# Altium PCB PCB_CBLX.PcbDoc
Units mm, origin at the board's own origin, x right, y up, seen from the top; angles counter-clockwise.
Board outline 114.68 x 132.84 mm, 2 copper layers (Top Layer, Bottom Layer); 15 components, 23 nets, 80 pads, 0 vias.
Unrouted connection lines stored in the file: 38.
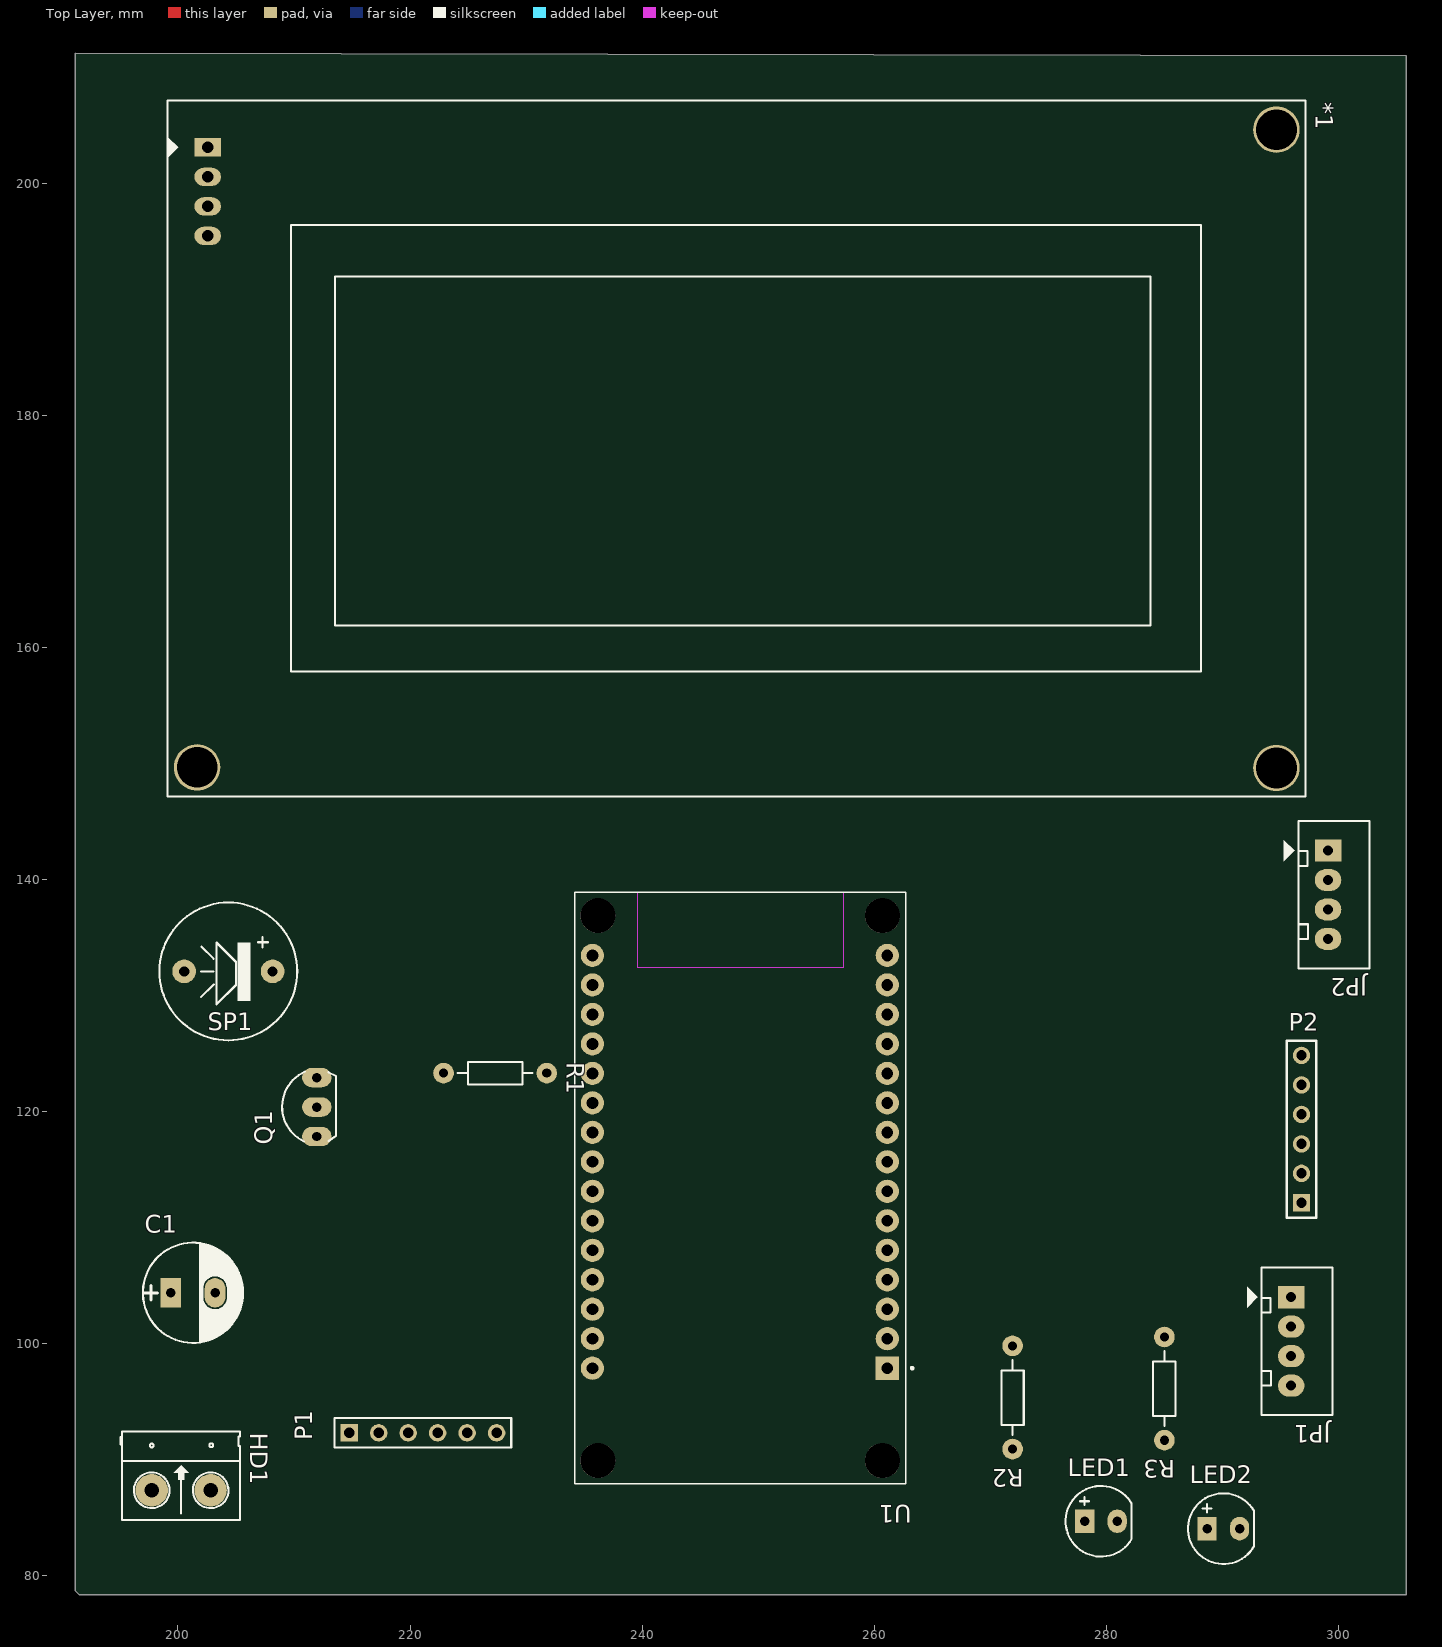
[diagram p0: Top Layer view]
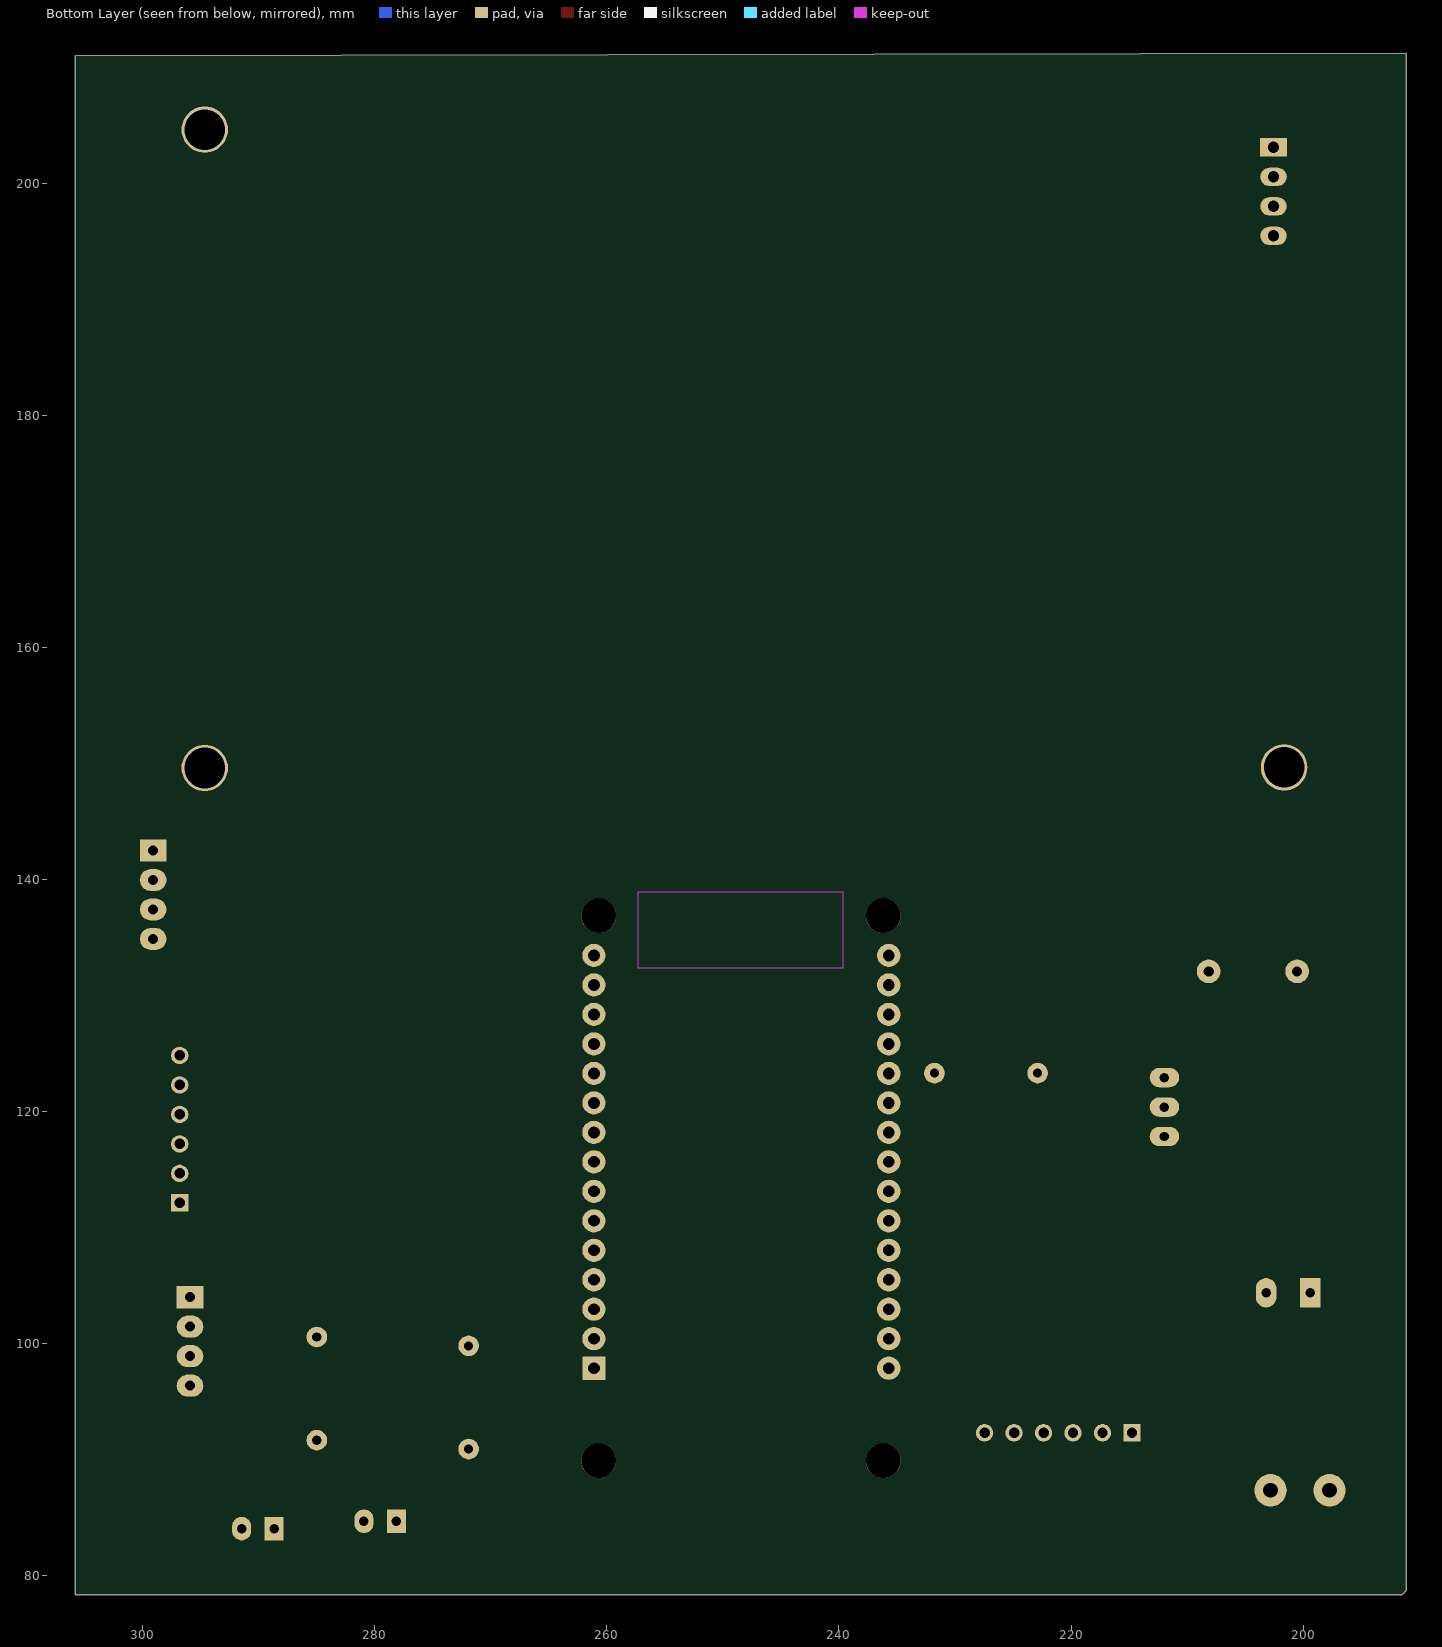
[diagram p1: Bottom Layer view, seen from below]

## Layer stack, top to bottom
Top Layer: signal copper 0.0356
Dielectric: dielectric 0.32, FR-4, Dk 4.8
Bottom Layer: signal copper 0.0356

## Board outline
305.816,210.947 305.816,78.359 191.516,78.359 191.135,78.74 191.135,211.201

## Design rules (kind name [scope] priority, off if disabled: settings)
Clearance [All] p1: gap=0.254
PolygonConnect [All] p1: connectstyle=Relief reliefconductorwidth=0.254 reliefentries=4 polygonreliefangle="90 Angle" airgapwidth=0.254
RoutingVias [All] p1: holewidth=0.711 width=1.27 viastyle="Through Hole" minholewidth=0.711 minwidth=1.27 maxholewidth=0.711 maxwidth=1.27
SolderMaskExpansion [All] p1: expansion=0.102
Width [All] p1: maxlimit=0.254 minlimit=0.254 preferedwidth=0.254
28 further rules are at their usual default settings.

## Components (designator, comment, footprint, x,y, rotation, side; value= is the part's Value field where it differs from the comment)
*1 "LCD_I2C" LCD_I2C_2004 200.533,206.502 r0 top
C1 "100uF" CP1.5/3.4 199.39,104.394 r0 top
HD1 "Header 2" HED2 197.739,87.376 r0 top
JP1 "GPS" CON4 295.91,104.013 r270 top
JP2 "MPU" CON4 299.085,142.494 r270 top
LED1 "LED" LED-5 279.527,84.709 r0 top
LED2 "LED" LED-5 290.068,84.074 r0 top
P1 "SIM" HDR1X6 214.757,92.329 r0 top
P2 "SD_CARD" HDR1X6 296.799,112.141 r90 top
Q1 "C1815" QTO-92 211.963,120.396 r90 top
R1 "1k" R1/4W 222.885,123.317 r0 top
R2 "1k" R1/4W 271.907,99.822 r270 top
R3 "1k" R1/4W 284.988,100.584 r270 top
SP1 "Speaker" SPK 208.153,132.08 r180 top
U1 "ESP32-DEVKIT-V1" MODULE_ESP32_DEVKIT_V1 248.412,113.411 r180 top

## Footprints (in the part's own frame and the unit in brackets; to place one, negate y for a bottom-side part, rotate by r counter-clockwise, add the part's x,y. Pads: shape width x height; smd on the part's side, far side on the other; paste and mask are expansions set on the pad)
CON4 [mil] "CON4 - Header White"
  rect 75x90 hole 34: 1(0,0)
  oval 75x90 hole 34: 2(100,0) 3(200,0) 4(300,0)
  silkscreen extent -100,-150 400,140, body extent -90,-90 398,136, height 276
CP1.5/3.4 [mil] "Tu hoa 220->470uF,16V, 470uF/16V,25V"
  rect 70x100 hole 32: 1(0,0)
  oval 70x100 hole 32: 2(150,0)
  silkscreen extent -95,-170 245,170, body extent -85,-157 230,157, height 446
HDR1X6 [mm] "Connector; Header; 6 Position"
  rect 1.5x1.5 hole 0.9: 1(0,0)
  round 1.5 hole 0.9: 2(2.54,0) 3(5.08,0) 4(7.62,0) 5(10.16,0) 6(12.7,0)
  silkscreen extent -1.27,-1.27 13.97,1.27
HED2 [mil] "Header 2, 2 pin, hight 300mil, Pin to Pin 200, Colour Green"
  round 110 hole 50: 1(0,0) 2(200,0)
  silkscreen extent -106,-100 300,200, body extent -92,-90 302,205, height 394
LCD_I2C_2004 [mil]
  rect 90x62 hole 39: 1(80,-135)
  oval 90x62 hole 39: 2(80,-235) 3(80,-335) 4(80,-435)
  round 157.48 hole 137.8: "Hole 0"(44,-2238) "Hole 0"(3705,-2240) "Hole 0"(3705,-75)
  silkscreen extent -56,-2337 3804,24, body extent -54,-2338 3804,24, height 413
LED-5 [mil] "LED 2 PIN, 5 ly , Only colour, pin to pin 110mil"
  rect 65x80 hole 32: 1(-55,0)
  oval 65x80 hole 32: 2(55,0)
  silkscreen extent -120,-120 104,120
MODULE_ESP32_DEVKIT_V1 [mm]
  rect 2x2 / inner round 2 / far side rect 2x2 hole 1.02: 1(-12.7,15.515)
  round 2 hole 1.02: 2(-12.7,12.975) 3(-12.7,10.435) 4(-12.7,7.895) 5(-12.7,5.355) 6(-12.7,2.815) 7(-12.7,0.275) 8(-12.7,-2.265) 9(-12.7,-4.805) 10(-12.7,-7.345) 11(-12.7,-9.885) 12(-12.7,-12.425) 13(-12.7,-14.965) 14(-12.7,-17.505) 15(-12.7,-20.045) 16(12.7,-20.045) 17(12.7,-17.505) 18(12.7,-14.965) 19(12.7,-12.425) 20(12.7,-9.885) 21(12.7,-7.345) 22(12.7,-4.805) 23(12.7,-2.265) 24(12.7,0.275) 25(12.7,2.815) 26(12.7,5.355) 27(12.7,7.895) 28(12.7,10.435) 29(12.7,12.975) 30(12.7,15.515)
  round 3 hole 3 unplated: ""(-12.28,23.475) ""(-12.28,-23.475) ""(12.23,23.475) ""(12.23,-23.475)
  Keep-Out Layer region: 8.78,-25.475 -8.91,-25.475 -8.91,-18.985 8.78,-18.985
  Keep-Out Layer region: 8.78,-25.475 -8.91,-25.475 -8.91,-18.985 8.78,-18.985
  silkscreen extent -14.95,-25.48 14.23,25.48, body extent -14.1,-25.9 14.1,26.55, height 7.05
QTO-92 [mil] "TO-92"
  oval 66x100 hole 32: 1(-100,0) 2(0,0) 3(100,0)
  silkscreen extent -117,-65 120,118, body extent -109,-66 109,95, height 385
R1/4W [mil] "R 1/4W, 2 Pin, 350mil"
  round 70 hole 31: 1(0,0) 2(350,0)
  silkscreen extent 48,-38 302,38, body extent -40,-47 386,47, height 111
SPK [mil] "Speaker Chip"
  round 80 hole 35: 1(0,0) 2(300,0)
  silkscreen extent -84,-234 384,234

## Part data
C1: library part CP3, "Cap 100uF/35V - 470uF/16V"
HD1: library part Hed2, "Header 2 (Green)"
JP1 JP2: library part Con4, "Connector 4"
LED1 LED2: "LED Single colour Green and Red"
P1 P2: library part "Header 6", "Header, 6-Pin"
Q1: "NPN 600mW, ECB"
R1 R2 R3: library part R1/4W, "Resistor 1/4W"
SP1: library part SPK, "Speaker Chip"
U1: "Dual core, Wi-Fi: 2.4 GHz up to 150 Mbits/s,BLE (Bluetooth Low Energy) and legacy Bluetooth, 32 bits, Up to 240 MHz"

## Nets (pads, with @x,y where several pads share a name; then routed paths per layer and width w, separated by ;. In a path a pad name is that pad's centre, name@x,y a point inside that pad or via, vN(x,y) a via of type N, cw(c..) or ccw(c..) an arc to the next point about the centre after c; other vN are vias at no path point)
3V3: U1.1
BIP: R1.2 U1.5
BUZZER: U1.28
CS: P2.1 U1.8
GND: *1.2 C1.2 HD1.2 JP1.4 JP2.2 P1.6 P2.6 Q1.1 R2.1 R3.1 U1.2 U1.29
GPS_RX: JP1.3 U1.6
GPS_TX: JP1.2 U1.7
MISO: P2.4 U1.10
MOSI: P2.3 U1.15
NetLED1_2: LED1.2 R2.2
NetLED2_2: LED2.2 R3.2
NetQ1_2: Q1.2 SP1.2
NetQ1_3: Q1.3 R1.1
PIR: LED2.1
RST_SIM: P1.3 U1.23
RX_SIM: P1.5 U1.25
SCK: P2.2 U1.9
SCL: *1.4 JP2.4 U1.14
SDA: *1.3 JP2.3 U1.11
STATUS: LED1.1 U1.4
TX_SIM: P1.4 U1.24
VCC: *1.1 C1.1 HD1.1 JP1.1 JP2.1 P1.2 P2.5 SP1.1 U1.30
VCC_OUT: 
pads on no net: "*1.Hole 0" P1.1 U1. U1.3 U1.12 U1.13 U1.16 U1.17 U1.18 U1.19 U1.20 U1.21 U1.22 U1.26 U1.27